# Altium PCB PCB_NON-CONTACT-THERMOMETER.PcbDoc
Units mm, origin at the board's own origin, x right, y up, seen from the top; angles counter-clockwise.
Board outline 101.09 x 71.12 mm, 2 copper layers (Top Layer, Bottom Layer); 17 components, 10 nets, 64 pads, 0 vias.
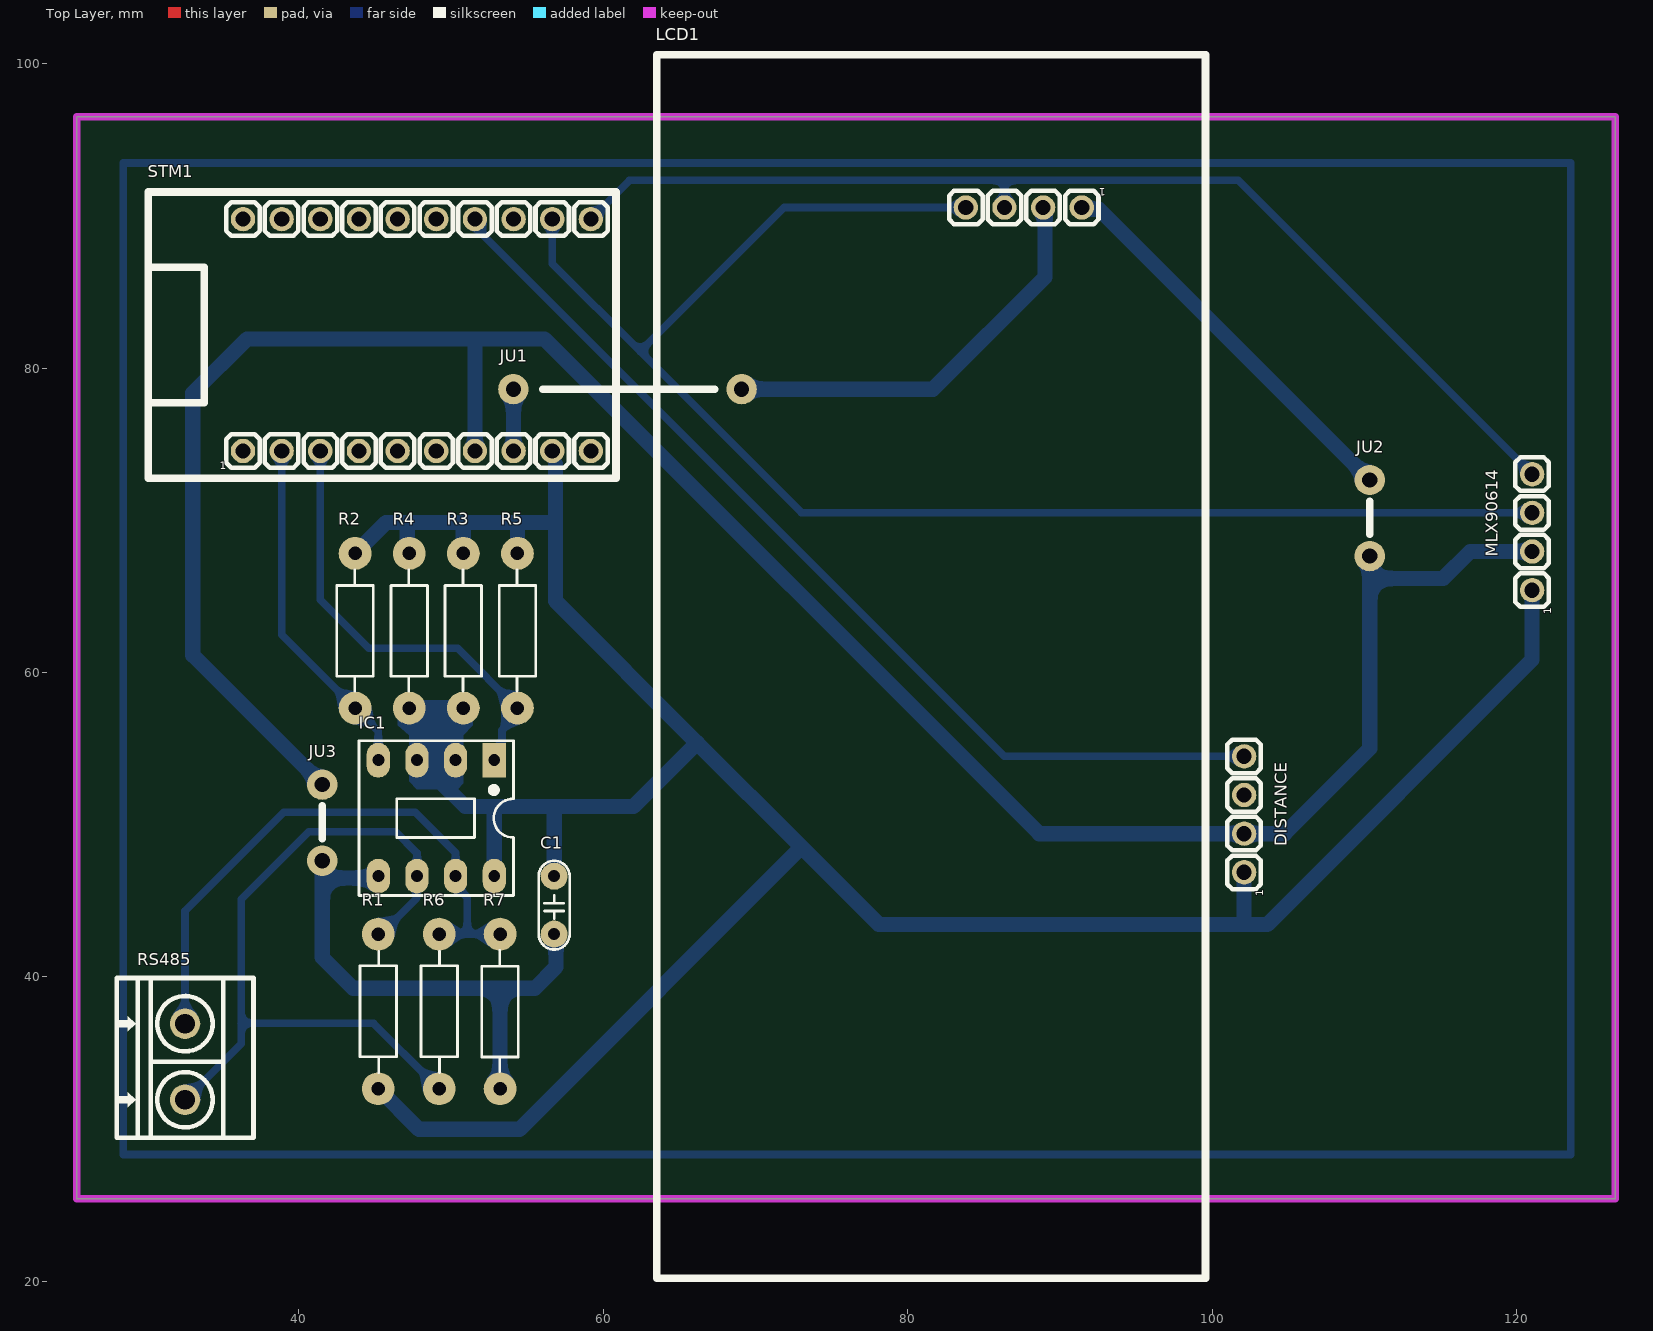
[diagram p0: Top Layer view]
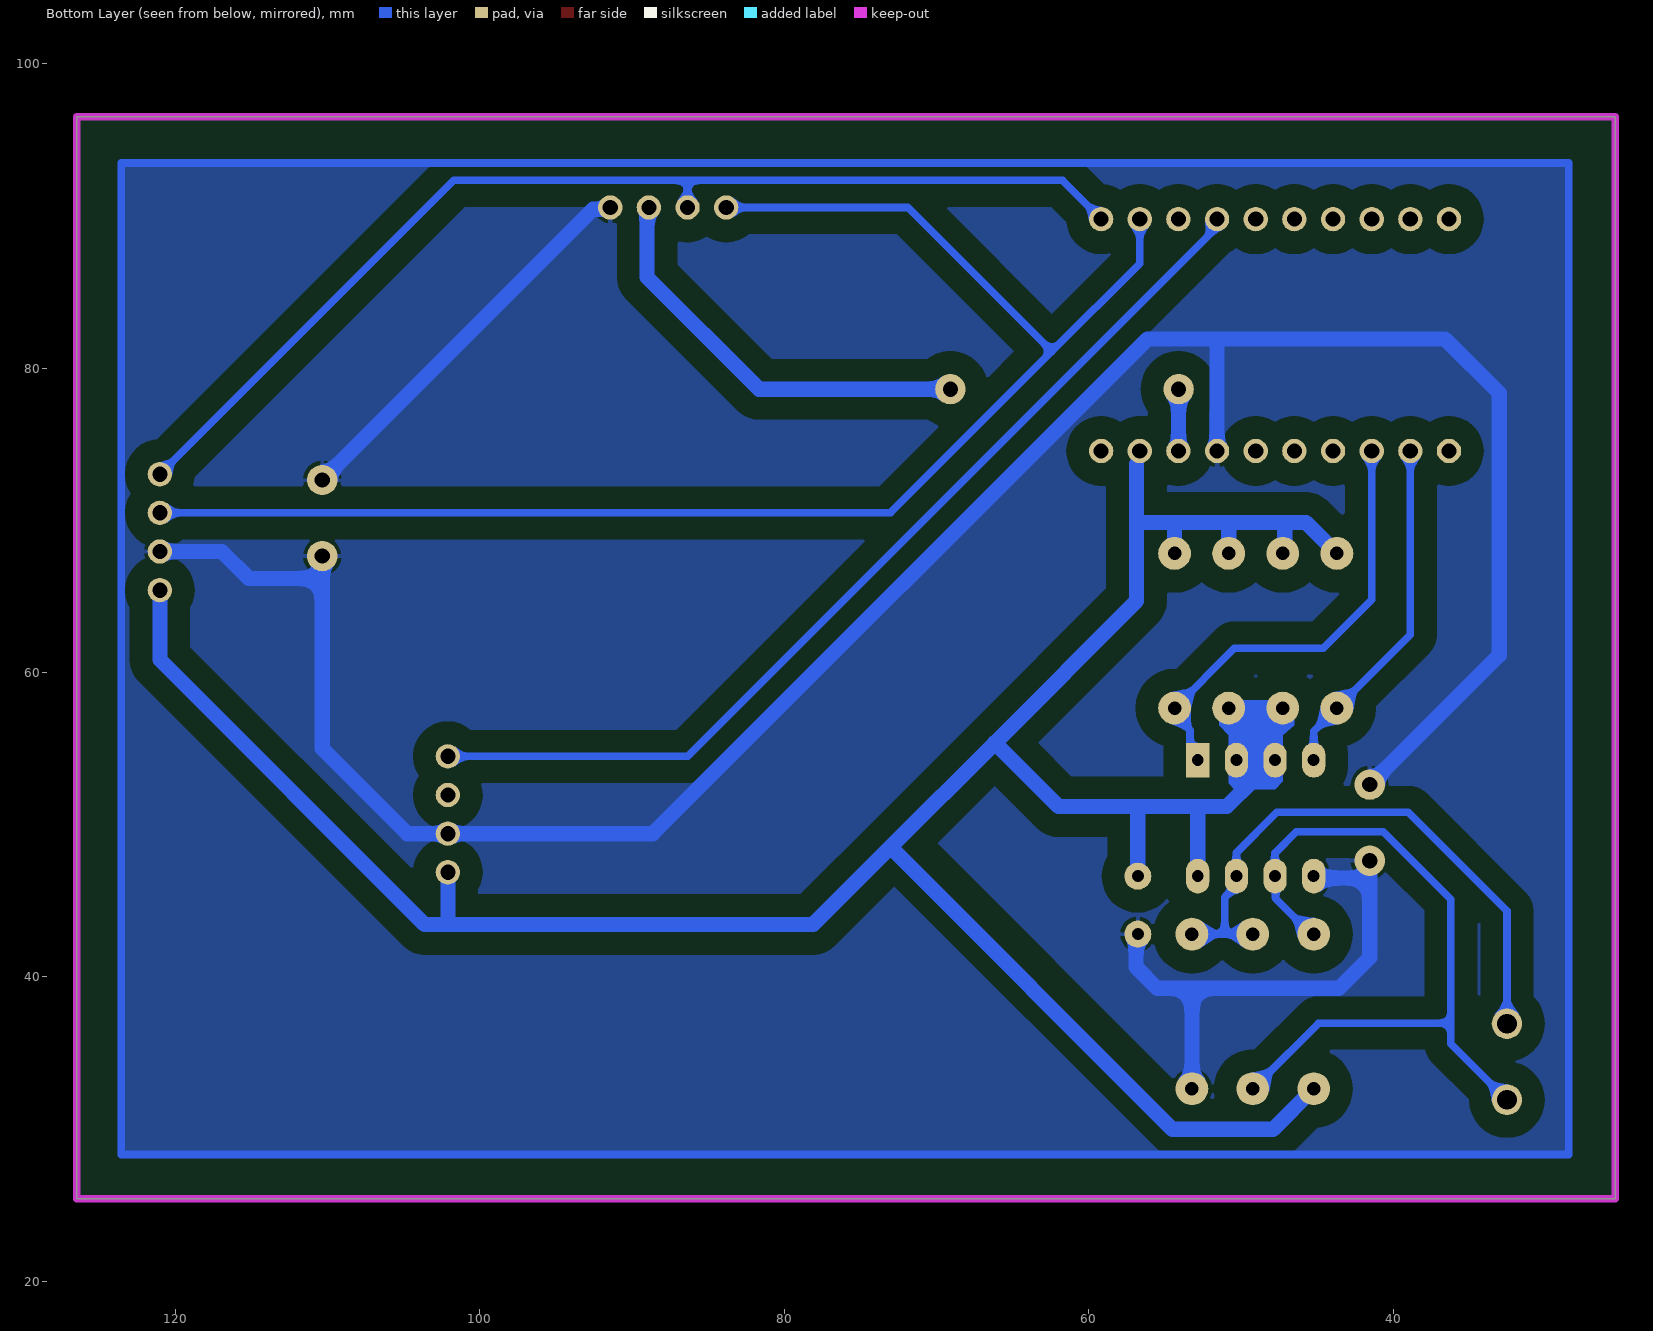
[diagram p1: Bottom Layer view, seen from below]

## Layer stack, top to bottom
Top Solder: solder mask 0.0102, Solder Resist, Dk 3.5
Top Layer: signal copper 0.0356
Dielectric 1: dielectric 0.32, FR-4, Dk 4.8
Bottom Layer: signal copper 0.0356
Bottom Solder: solder mask 0.0102, Solder Resist, Dk 3.5

## Board outline
25.4,25.4 25.4,96.52 126.492,96.52 126.492,25.4

## Design rules (kind name [scope] priority, off if disabled: settings)
Clearance [All] p1: gap=0.5 ignorepadtopadclearanceinfootprint=FALSE
PolygonConnect [All] p1: connectstyle=Relief reliefconductorwidth=0.254 reliefentries=4 polygonreliefangle="90 Angle" airgapwidth=0.254
RoutingVias [All] p1: holewidth=1 width=1.5 viastyle="Through Hole" minholewidth=1 minwidth=1.5 maxholewidth=1 maxwidth=1.5
SolderMaskExpansion [All] p1: expansion=0.102 istentingtop=FALSE
Width [All] p1: maxlimit=1 minlimit=0.4 preferedwidth=0.5
30 further rules are at their usual default settings.

## Components (designator, comment, footprint, x,y, rotation, side; value= is the part's Value field where it differs from the comment)
C1 "100nF" CN1.5 56.769,44.577 r90 top value=33pF
DISTANCE "Header 4" "HEADER x4" 98.668,55.693 r90 top
IC1 "MAX3485" DIP8 49.149,50.419 r180 top
JU1 "JUMPER" "JUMPER 15MM" 69.088,78.613 r180 top
JU2 "JUMPER" "JUMPER 5MM" 110.363,72.644 r270 top
JU3 "JUMPER" "JUMPER 5MM" 41.529,52.625 r270 top
LCD1 "LCD1602-I2C" LCD1602-I2C 83.82,90.551 r270 top locked
MLX90614 "Header 4" "HEADER x4" 117.591,74.235 r90 top
R1 "10K" RES-1/4W 45.339,38.1 r90 top
R2 "10K" RES-1/4W 43.561,62.357 r270 top
R3 "10K" RES-1/4W 50.673,62.357 r270 top
R4 "10K" RES-1/4W 47.117,62.357 r270 top
R5 "10K" RES-1/4W 54.229,62.357 r270 top
R6 "120R" RES-1/4W 49.34,38.1 r90 top
R7 "10K" RES-1/4W 53.086,37.338 r270 top
RS485 "Terminal" "Terminal x2 5mm" 32.512,34.417 r270 top
STM1 "STM8-BOARD" STM8-BOARD 59.182,74.549 r90 top locked

## Footprints (in the part's own frame and the unit in brackets; to place one, negate y for a bottom-side part, rotate by r counter-clockwise, add the part's x,y. Pads: shape width x height; smd on the part's side, far side on the other; paste and mask are expansions set on the pad)
CN1.5 [mil]
  round 70 hole 31: 1(-70,0) 2(80,0)
  silkscreen extent -110,-40 120,40, body extent -110,-33 120,33, height 235
DIP8 [mil] "DIP, 8-Leads, Row Spacing 7.62mm, Pitch 2.54mm, Body 9.91x6.73mm"
  rect 60x90 hole 31: 1(-145,-150)
  oval 60x90 hole 31: 2(-45,-150) 3(55,-150) 4(155,-150) 5(155,150) 6(55,150) 7(-45,150) 8(-145,150)
  silkscreen extent -195,-200 205,200, body extent -213,-153 213,153, height 177
"HEADER x4" [mm] "Header 4"
  round 1.6 hole 1 mask+0.1: 1(-8.83,-3.44) 2(-6.29,-3.44) 3(-3.75,-3.44) 4(-1.21,-3.44)
  silkscreen extent -9.93,-4.54 -0.11,-2.34, body extent -10.13,-4.74 0.03,-2.2, height 5.94
"JUMPER 5MM" [mm]
  round 2 hole 1: 1(0,0) 2(5,0)
  silkscreen extent 1.4,0 3.56,0
"JUMPER 15MM" [mm]
  round 2 hole 1: 1(0,0) 2(15,0)
  silkscreen extent 1.78,0 13.08,0
LCD1602-I2C [mm]
  round 1.6 hole 1 mask+0.1: 1(0,7.62) 2(0,5.08) 3(0,2.54) 4(0,0)
  silkscreen extent -10.03,-20.32 70.36,15.75, body extent -1.3,-1.24 1.24,8.92, height 5.94
RES-1/4W [mil]
  round 85 hole 35: 1(-215,5) 2(185,5)
  silkscreen extent -173,-42 141,52, body extent -227,-42 197,52, height 95
STM8-BOARD [mm]
  round 1.6 hole 1 mask+0.1: 1(0,22.86) 2(0,20.32) 3(0,17.78) 4(0,15.24) 5(0,12.7) 6(0,10.16) 7(0,7.62) 8(0,5.08) 9(0,2.54) 10(0,0) 11(15.24,0) 12(15.24,2.54) 13(15.24,5.08) 14(15.24,7.62) 15(15.24,10.16) 16(15.24,12.7) 17(15.24,15.24) 18(15.24,17.78) 19(15.24,20.32) 20(15.24,22.86)
  silkscreen extent -1.78,-1.65 17.02,29.08, body extent -1.3,-1.24 16.48,24.16, height 5.94
"Terminal x2 5mm" [mm] "KF301 - 3P"
  round 2 hole 1.3 mask+0.1: 1(-2.5,0) 2(2.5,0)
  silkscreen extent -5.5,-4.5 5,4.5, body extent -5.6,-3.04 5,4.56, height 10

## Part data
C1: library part CN
IC1: library part MAX485, "RS232 - RS485 (Same sn75176)"
R1 R2 R3 R4 R5 R6 R7: library part Res, "Res", Manufacturer="Generic Components", Class=Passive, Published=08/06/2000, Publisher="Altium Hobart Technology Centre", SubClass=R
RS485: library part "Terminal x2", "Terminal x2"

## Nets (pads, with @x,y where several pads share a name; then routed paths per layer and width w, separated by ;. In a path a pad name is that pad's centre, name@x,y a point inside that pad or via, vN(x,y) a via of type N, cw(c..) or ccw(c..) an arc to the next point about the centre after c; other vN are vias at no path point)
3V3: C1.2 DISTANCE.1 IC1.2 IC1.3 IC1.8 MLX90614.1 R1.1 R2.1 R3.1 R3.2 R4.1 R4.2 R5.1 STM1.9 | length 195.6
  Bottom Layer w0.5: STM1.9 56.852,74.339 56.852,73.704
  Bottom Layer w1: R2.1 45.72,69.85 47.117,69.85 ; R1.1 47.879,29.972 54.483,29.972 73.025,48.514 ; R4.2 49.022,57.658 ; R4.1 47.117,67.945 47.117,69.85 ; IC1.3 47.752,53.99 47.994,53.748 48.36,53.748 49.022,53.086 ; IC1.2 50.292,53.848 49.276,52.832 ; R3.2 49.022,57.658 ; R3.1 50.8,69.85 ; IC1.8 52.832,51.181 ; R5.1 54.356,69.85 ; C1.2 56.769,51.181 ; 56.852,73.704 56.852,69.85 ; DISTANCE.1 102.108,43.561 102.235,43.434 ; MLX90614.1 121.031,60.833 103.632,43.434 102.235,43.434 ; 47.117,69.85 50.8,69.85 ; 49.022,53.086 49.276,52.832 ; 49.022,53.086 49.022,57.658 ; 49.276,52.832 50.927,51.181 52.832,51.181 ; 50.8,69.85 54.356,69.85 ; 52.832,51.181 56.769,51.181 ; 54.356,69.85 56.852,69.85 ; 56.769,51.181 61.976,51.181 66.167,55.372 ; 56.852,69.85 56.852,64.687 66.167,55.372 ; 66.167,55.372 73.025,48.514 ; 73.025,48.514 78.105,43.434 102.235,43.434
5V: JU1.1 JU1.2 LCD1.2 STM1.8 | length 31.7
  Bottom Layer w1: JU1.2 54.088,78.373 54.095,78.366 54.095,74.556 STM1.8 ; JU1.1 81.661,78.613 89.015,85.967 89.015,90.436 LCD1.2
A: IC1.6 R1.2 R6.1 RS485.2 | length 50.2
  Top Layer w0.5: IC1.6 IC1.6@47.879,46.482
  Bottom Layer w0.5: RS485.2 36.195,35.6 36.195,36.957 ; R1.2 45.38,42.799 47.711,45.13 47.711,46.568 IC1.6 ; IC1.6@47.754,46.861 47.754,48.131 46.355,49.53 40.64,49.53 36.195,45.085 36.195,36.957 ; R6.1 49.213,33.084 48.768,33.084 44.895,36.957 36.195,36.957
AO: DISTANCE.4 STM1.14 | length 65.5
  Bottom Layer w0.5: STM1.14 51.772,89.579 51.772,89.071 86.36,54.483 DISTANCE.4
B: IC1.7 R6.2 R7.1 RS485.1 | length 38.6
  Bottom Layer w0.5: RS485.1 32.512,44.323 38.989,50.8 47.625,50.8 50.292,48.133 50.292,45.974 51.054,45.212 51.054,42.799 ; R6.2 51.054,42.799 ; R7.1 51.054,42.799
DI: IC1.4 R2.2 STM1.2 | length 23
  Bottom Layer w0.5: STM1.2 38.862,62.484 R2.2 45.212,56.134 IC1.4
GND: C1.1 DISTANCE.2 IC1.5 JU2.1 JU2.2 JU3.1 JU3.2 LCD1.1 MLX90614.2 R7.2 STM1.7 | length 538.3
  Bottom Layer w0.5: 28.448,28.321 123.571,28.321 123.571,93.472 28.448,93.472 28.448,28.321
  Bottom Layer w1: JU3.2 41.529,46.482 ; JU3.1 33.02,61.134 33.02,78.359 36.576,81.915 51.435,81.915 ; IC1.5@45.212,46.228 IC1.5@45.212,46.24 ; IC1.5 IC1.5@45.212,46.24 ; STM1.7 51.562,81.788 51.435,81.915 ; R7.2 53.213,39.243 ; C1.1 56.896,42.672 56.896,40.64 55.499,39.243 53.213,39.243 ; LCD1.1 91.555,90.436 92.571,90.436 JU2.1 ; JU2.2 110.363,66.167 ; MLX90614.2 116.967,67.945 115.189,66.167 110.363,66.167 ; 41.529,46.482 44.97,46.482 IC1.5@45.212,46.24 ; 41.529,46.482 41.529,41.275 43.561,39.243 53.213,39.243 ; 51.435,81.915 56.134,81.915 88.646,49.403 DISTANCE.2 104.775,49.403 110.363,54.991 110.363,66.167
RO: IC1.1 R5.2 STM1.3 | length 30
  Bottom Layer w0.5: STM1.3 41.402,64.77 44.577,61.595 50.419,61.595 R5.2 54.356,57.209 53.344,56.197 53.344,54.36 53.213,54.229 IC1.1
SCL: LCD1.4 MLX90614.3 STM1.12 | length 99.6
  Bottom Layer w0.5: STM1.12 56.642,86.868 62.42,81.09 ; LCD1.4@83.82,90.678 83.693,90.551 71.882,90.551 62.42,81.09 ; MLX90614.3 73.025,70.485 62.42,81.09
  Bottom Layer w1: LCD1.4 LCD1.4@83.82,90.678
SDA: LCD1.3 MLX90614.4 STM1.11 | length 72.7
  Bottom Layer w0.5: STM1.11 61.722,92.329 86.36,92.329 ; LCD1.3 86.36,92.329 ; MLX90614.4 101.727,92.329 86.36,92.329
pads on no net: DISTANCE.3 STM1.1 STM1.4 STM1.5 STM1.6 STM1.10 STM1.13 STM1.15 STM1.16 STM1.17 STM1.18 STM1.19 STM1.20

## Polygon pours and split planes (outlines as drawn)
GND on Bottom Layer "GND_L02_P000" (solid, pour order 0): 28.448,93.472 123.571,93.472 123.571,28.321 28.448,28.321

## Keep-outs
Keep-Out Layer:
  the board outline again, w0.5

## Other copper
Bottom Layer:
  region net 3V3: 46.482,58.166 51.435,58.166 51.435,56.515 50.8,55.88 50.8,52.705 50.419,52.324 47.752,52.324 47.244,52.832 47.244,55.88 46.482,56.515

## Text inside footprints (layer, text, board x,y; h text height)
DISTANCE: Top Overlay "1" at 103.368,45.293 h0.5 r90; Mechanical 1 "1" at 102.468,46.693 h0.8 r90; Mechanical 1 "2" at 102.468,49.093 h0.8 r90; Mechanical 1 "3" at 102.468,51.693 h0.8 r90; Mechanical 1 "4" at 102.468,54.193 h0.8 r90
LCD1: Top Overlay "1" at 93.01,91.811 h0.5 r180; Mechanical 1 "4" at 84.11,90.911 h0.8 r180; Mechanical 1 "3" at 86.61,90.911 h0.8 r180; Mechanical 1 "2" at 89.21,90.911 h0.8 r180; Mechanical 1 "1" at 91.61,90.911 h0.8 r180
MLX90614: Top Overlay "1" at 122.291,63.835 h0.5 r90; Mechanical 1 "1" at 121.391,65.235 h0.8 r90; Mechanical 1 "2" at 121.391,67.635 h0.8 r90; Mechanical 1 "3" at 121.391,70.235 h0.8 r90; Mechanical 1 "4" at 121.391,72.735 h0.8 r90
RS485: Mechanical 1 "2" at 31.941,32.218 h1.2 r270; Mechanical 1 "1" at 31.941,37.108 h1.2 r270
STM1: Top Overlay "1" at 34.782,73.349 h0.5; Mechanical 1 "5" at 46.282,74.149 h0.8; Mechanical 1 "4" at 43.682,74.149 h0.8; Mechanical 1 "3" at 41.182,74.149 h0.8; Mechanical 1 "1" at 36.202,74.149 h0.8; Mechanical 1 "2" at 38.602,74.149 h0.8; Mechanical 1 "9" at 56.382,74.049 h0.8; Mechanical 1 "7" at 51.382,74.049 h0.8; Mechanical 1 "10" at 58.682,74.249 h0.6; Mechanical 1 "6" at 48.752,74.099 h0.8; Mechanical 1 "8" at 53.782,72.949 h0.8; Mechanical 1 "10" at 58.682,89.489 h0.6; Mechanical 1 "8" at 53.782,88.189 h0.8; Mechanical 1 "9" at 56.382,89.289 h0.8; Mechanical 1 "6" at 48.752,89.339 h0.8; Mechanical 1 "4" at 43.682,89.389 h0.8; Mechanical 1 "3" at 41.182,89.389 h0.8; Mechanical 1 "2" at 38.602,89.389 h0.8; Mechanical 1 "1" at 36.202,89.389 h0.8; Mechanical 1 "5" at 46.282,89.389 h0.8; Mechanical 1 "7" at 51.382,89.289 h0.8